# Altium PCB gecko3.PcbDoc (part 3 of 8)
Units mm, origin at the board's own origin, x right, y up, seen from the top; angles counter-clockwise.
Board outline 85.5 x 54.02 mm, 10 copper layers (Top Layer, MidLayer1, 1.2 & 2.5V Plane, GND Plane1, DDR layer 1, 3.3V Plane, DDR layer 2, GND Plane2, MidLayer2, Bottom Layer), stack 1.39 mm thick; 295 components, 567 nets, 2310 pads, 1568 vias.
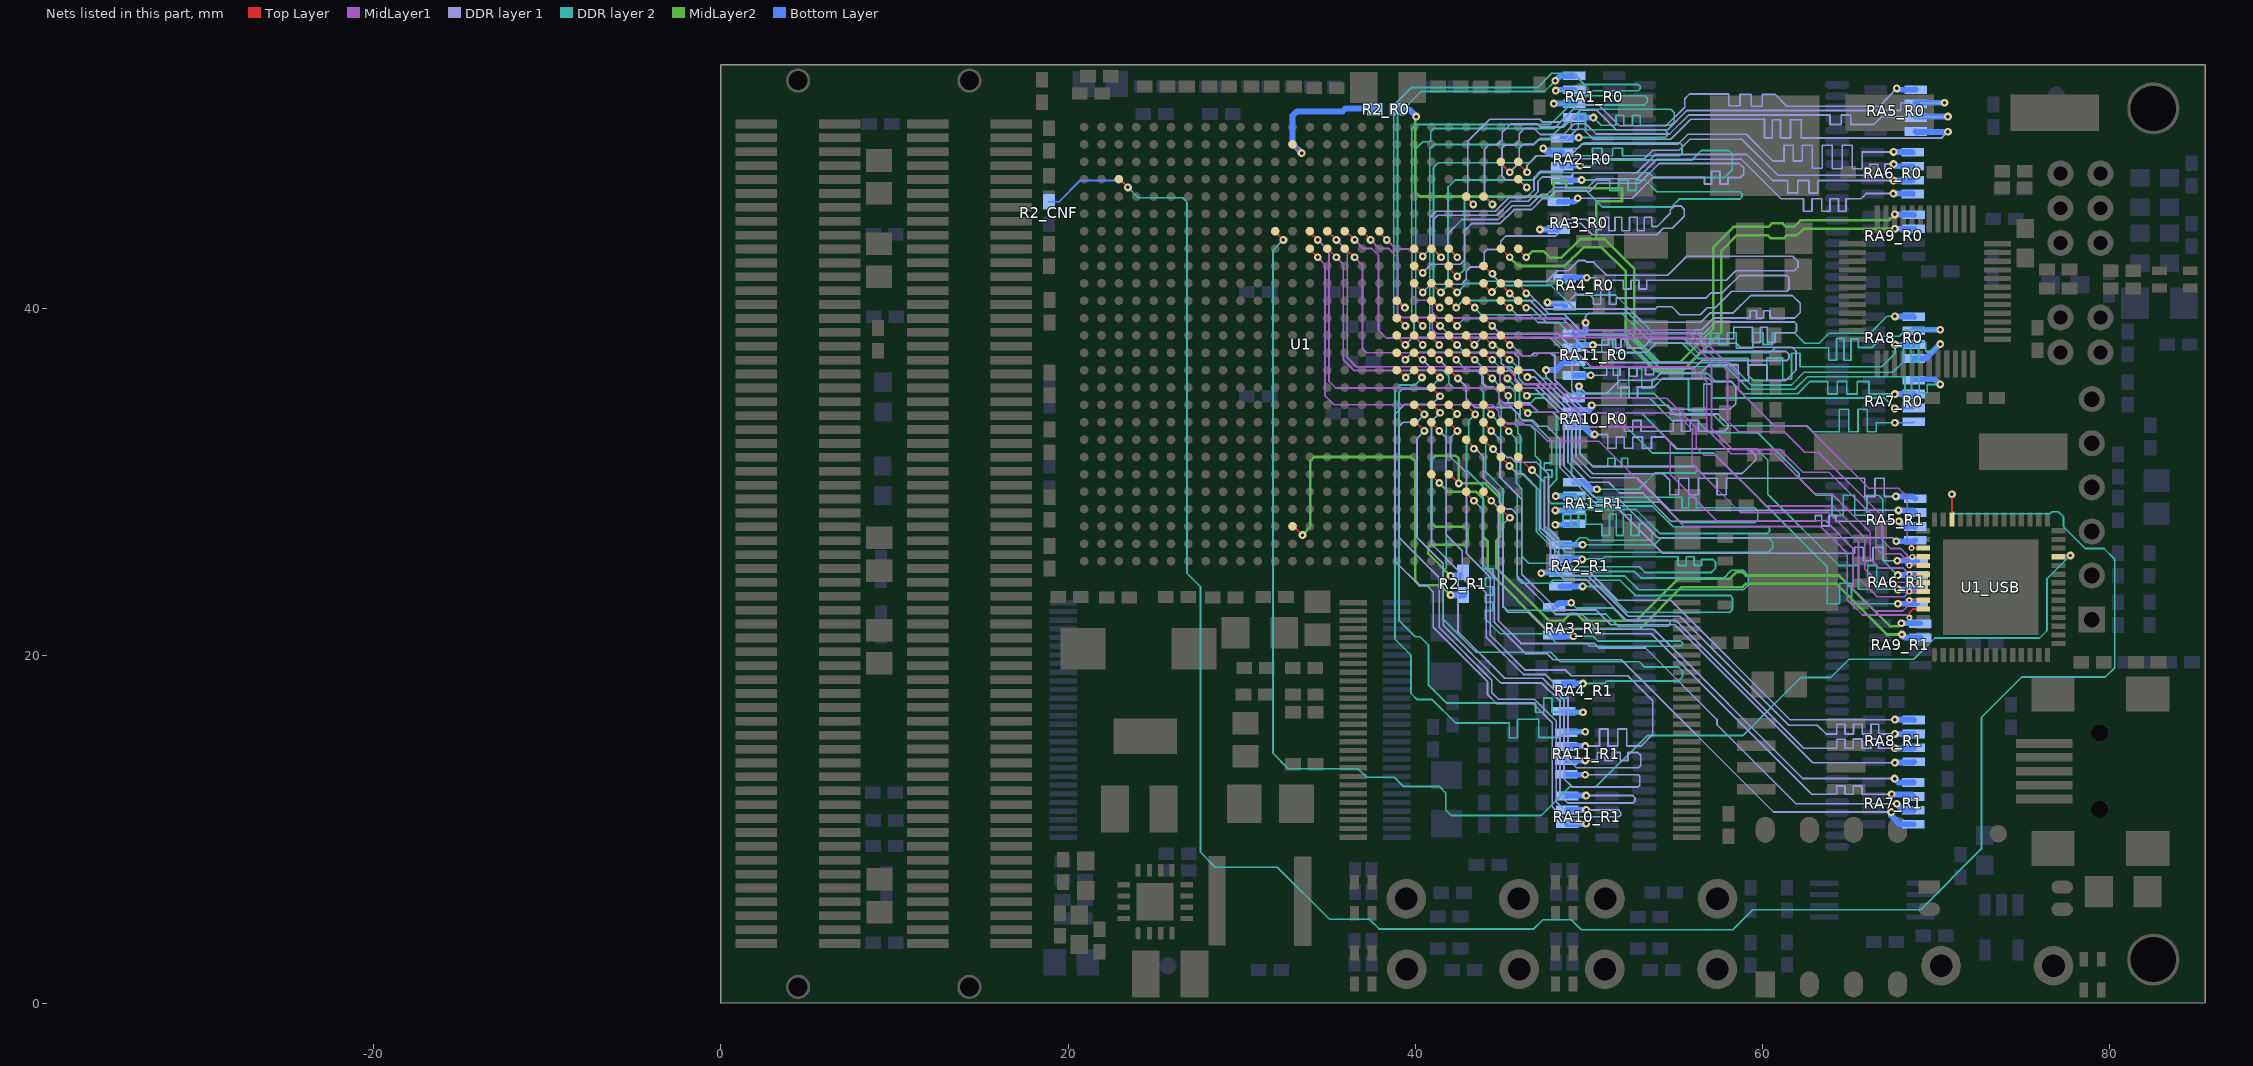
[diagram p11: the nets of this part, all layers, seen from the top]

## Via types
v1: diameter 0.45, hole 0.2, Top Layer to Bottom Layer, tented both sides, 1470 vias
v2: diameter 0.45, hole 0.2, Top Layer to Bottom Layer, tented bottom, 62 vias
v3: diameter 0.35, hole 0.15, Top Layer to MidLayer1, tented both sides, 26 vias
v4: diameter 0.45, hole 0.2, MidLayer2 to Bottom Layer, tented both sides, 10 vias

## Nets (pads, with @x,y where several pads share a name; then routed paths per layer and width w, separated by ;. In a path a pad name is that pad's centre, name@x,y a point inside that pad or via, vN(x,y) a via of type N, cw(c..) or ccw(c..) an arc to the next point about the centre after c; other vN are vias at no path point) (continued)
D7: U1.Y15 U1_USB.25 | length 87.1
  Top Layer w0.1: U1.Y15@31.927,44.449 31.927,44.423 v1(32.4,43.95) ; U1_USB.25@77.05,25.7 77.65,25.7 v1(77.725,25.775)
  DDR layer 2 w0.1: v1(32.4,43.95) 31.8,43.35 31.8,14.382 32.682,13.5 36.7,13.5 37.2,13 38.775,13 39.3,12.475 41.375,12.475 41.757,12.093 41.757,11.118 42.075,10.8 47.25,10.8 48.9,12.45 50.4,12.45 53.353,15.403 58.853,15.403 62.2,18.75 63.925,18.75 64.975,19.8 68.7,19.8 69.925,21.025 75.945,21.025 76.375,21.455 76.375,24.425 v1(77.725,25.775)
D8: U1.Y9 U1_USB.45 | length 42.9
  Top Layer w0.1: U1.Y9@37.927,44.449 37.927,44.373 v1(38.35,43.95) ; v3(68.575,26.2) U1_USB.45@69.25,26.2 U1_USB.45@69.15,26.3
  MidLayer1 w0.1: v1(38.35,43.95) 38.875,43.425 39.6,43.425 39.8,43.225 39.8,40.775 40.1,40.475 40.75,40.475 40.975,40.25 40.975,39.775 41.3,39.45 48.45,39.45 49.125,38.775 56,38.775 58.625,36.15 58.625,35.3 60.7,33.225 62.55,33.225 66.125,29.65 67.825,29.65 68.325,29.15 68.325,26.65 68.575,26.4 v3(68.575,26.2)
D9: U1.Y10 U1_USB.46 | length 44.7
  Top Layer w0.1: U1.Y10@36.927,44.449 v1(37.425,43.95) ; v3(68.625,25.7) U1_USB.46@69.25,25.7
  MidLayer1 w0.1: v1(37.425,43.95) 37.925,43.45 38.475,43.45 38.975,42.95 38.975,39.75 39.25,39.475 40.725,39.475 40.975,39.225 40.975,38.8 41.225,38.55 55.825,38.55 57.975,36.4 57.975,33.55 58.623,32.902 61.248,32.902 62.425,31.725 63.2,31.725 66.872,28.053 66.872,26.678 67.375,26.175 67.95,26.175 68.425,25.7 v3(68.625,25.7)
D10: U1.Y11 U1_USB.47 | length 47.2
  Top Layer w0.1: U1.Y11@35.927,44.449 36.001,44.449 v1(36.5,43.95) ; v3(68.45,25.2) U1_USB.47@69.25,25.2
  MidLayer1 w0.1: v1(36.5,43.95) 37,43.45 37.5,43.45 37.875,43.075 37.875,38.75 38.325,38.3 46.6,38.3 46.625,38.325 55.65,38.325 57.05,36.925 57.05,33.1 58.275,31.875 61.025,31.875 62.325,30.575 63.825,30.575 66.518,27.882 66.518,26.207 66.85,25.875 67.925,25.875 68.45,25.35 v3(68.45,25.2)
D11: U1.W11 U1_USB.48 | length 46.5
  Top Layer w0.1: U1.W11@35.927,43.449 v1(36.5,42.95) ; v3(68.45,24.7) U1_USB.48@69.25,24.7
  MidLayer1 w0.1: v1(36.5,42.95) 36.95,42.5 36.95,37.7 37.2,37.45 45.95,37.45 46.125,37.275 46.962,37.275 47.138,37.45 49.3,37.45 50.125,36.625 55.925,36.625 56.775,35.775 56.775,33.05 58.197,31.628 60.697,31.628 63,29.325 63.975,29.325 66.2,27.1 66.2,25.575 66.725,25.05 68.1,25.05 v3(68.45,24.7)
D12: U1.Y12 U1_USB.49 | length 48.2
  Top Layer w0.1: U1.Y12@34.927,44.449 34.951,44.449 v1(35.45,43.95) ; v3(68.45,24.2) U1_USB.49@69.25,24.2
  MidLayer1 w0.1: v1(35.45,43.95) 36.075,43.325 36.075,37.175 36.6,36.65 45.2,36.65 45.725,36.125 45.725,35.875 45.95,35.65 48.23,35.65 49.052,34.828 54.472,34.828 56.175,33.125 56.175,32 56.625,31.55 57.275,31.55 60.2,28.625 64.05,28.625 65.875,26.8 65.875,25 66.647,24.228 68.422,24.228 v3(68.45,24.2)
D13: U1.W12 U1_USB.50 | length 48.6
  Top Layer w0.1: U1.W12@34.927,43.449 34.951,43.449 v1(35.45,42.95) ; v3(68.45,23.7) U1_USB.50@69.25,23.7
  MidLayer1 w0.1: v1(35.45,42.95) 35.85,42.55 35.85,37.05 36.475,36.425 44.6,36.425 44.875,36.15 44.875,35.7 45.175,35.4 48.155,35.4 49.555,34 54.982,34 55.95,33.032 55.95,31.025 58.725,28.25 63.8,28.25 65.525,26.525 65.525,24.475 66.6,23.4 68.15,23.4 v3(68.45,23.7)
D14: U1.Y13 U1_USB.51 | length 51.9
  Top Layer w0.1: U1.Y13@33.927,44.449 33.927,44.398 v1(34.375,43.95) ; v3(68.45,23.2) U1_USB.51@69.25,23.2
  MidLayer1 w0.1: v1(34.375,43.95) 35.025,43.3 35.025,35.8 35.4,35.425 44.575,35.425 44.825,35.175 44.825,34.8 45.2,34.425 46.675,34.425 47.075,34.025 49.2,34.025 50.05,33.175 53.8,33.175 54.675,32.3 54.675,30.45 57.35,27.775 63.625,27.775 65.2,26.2 65.2,23.875 66.5,22.575 68.075,22.575 68.45,22.95 v3(68.45,23.2)
D15: U1.W13 U1_USB.52 | length 50.7
  Top Layer w0.1: U1.W13@33.927,43.449 33.927,43.398 v1(34.375,42.95) ; v3(68.45,22.2) 68.45,22.475 68.675,22.7 U1_USB.52@69.25,22.7
  MidLayer1 w0.1: v1(34.375,42.95) 34.8,42.525 34.8,34.975 35.325,34.45 44.425,34.45 44.8,34.075 44.8,33.825 45.25,33.375 46.25,33.375 46.35,33.275 46.7,33.275 47.625,32.35 50.575,32.35 55.475,27.45 63.325,27.45 64.875,25.9 64.875,23.225 65.75,22.35 68.3,22.35 v3(68.45,22.2)
DONE: R2_CNF.2 U1.AC24 U1_USB.40 | length 132.7
  Top Layer w0.1: U1.AC24@22.927,47.449 22.976,47.449 v1(23.45,46.975) ; U1_USB.40@70.9,27.85 v1(70.9,29.3)
  DDR layer 2 w0.1: v1(23.45,46.975) 24.025,46.375 26.6,46.375 26.85,46.125 26.85,24.75 27.625,23.975 27.625,8.68 28.48,7.825 32.05,7.825 35.055,4.82 37.355,4.82 37.905,4.27 46.82,4.27 47.35,4.8 48.982,4.8 49.557,4.225 58.275,4.225 59.425,5.375 69.1,5.375 72.6,8.875 72.6,16.448 74.927,18.775 79.728,18.775 80.272,19.318 80.272,25.565 79.662,26.175 78.575,26.175 77.325,27.425 77.325,28 77.025,28.3 76.675,28.3 76.55,28.175 71.075,28.175 70.9,28.35 v1(70.9,29.3)
  Bottom Layer w0.1: R2_CNF.2@18.9,46.15 19.475,46.15 20.7,47.375 23.025,47.375 v1(23.45,46.975)
DRAM_A0_0: RA2_R0.4 U1.P6 | length 35.3
  Top Layer w0.1: U1.P6@40.927,38.449 40.927,38.348 v1(41.375,37.9)
  DDR layer 2 w0.1: 41.085,49.45 40.825,49.19 40.825,38.45 v1(41.375,37.9) ; 47.6,49.796 47.746,49.796 48.7,50.75 48.975,50.75 48.975,50.3 49.375,50.3 49.375,51.241 49.8,51.241 49.8,50.296 ; v1(49.411,49.846) 54.386,49.846 54.511,49.971 54.511,50.146 54.361,50.296 50.661,50.296
  DDR layer 2 w0.101: 41.085,49.45 46.84,49.45 47.186,49.796 47.6,49.796 ; 49.8,50.296 50.661,50.296
  Bottom Layer w0.34: RA2_R0.4@48.461,49.796 v1(49.411,49.846)
DRAM_A0_1: RA1_R0.1 U1.R7 | length 36.1
  Top Layer w0.1: U1.R7@39.927,39.449 39.976,39.449 v1(40.425,39) v1@40.425,38.975
  DDR layer 2 w0.1: v1@40.425,38.975 40.412,38.988 40.025,39.375 40.025,49.185 40.436,49.596 40.786,49.596 40.886,49.696 40.886,50.196 41.061,50.371 47.996,50.371 49.1,51.475 54.7,51.475 54.911,51.264 54.911,50.771 54.686,50.546 52.95,50.546 52.95,51.125 52.5,51.125 52.5,50.546 52,50.546 52,51.125 51.55,51.125 51.55,50.546 50.705,50.546 v1(50.255,50.996)
  Bottom Layer w0.34: RA1_R0.1@49.161,50.996 v1(50.255,50.996)
DRAM_A0_2: RA1_R0.2 U1.P7 | length 34.7
  Top Layer w0.1: U1.P7@39.927,38.449 39.927,38.398 v1(40.425,37.9)
  DDR layer 2 w0.1: v1(40.425,37.9) 39.927,38.398 39.927,39.148 39.8,39.275 39.8,50.335 40.061,50.596 47.771,50.596 48.771,51.596
  DDR layer 2 w0.101: v1(47.975,51.8) 48.536,51.796 48.99,52.25 53.225,52.25 53.361,52.114 53.361,51.871 53.215,51.725 48.9,51.725 48.771,51.596
  Bottom Layer w0.34: v1(47.975,51.8) RA1_R0.2@49.161,51.796
DRAM_A0_3: RA1_R0.3 U1.R8 | length 35.1
  Top Layer w0.1: U1.R8@38.927,39.449 38.976,39.449 v1(39.425,39)
  DDR layer 2 w0.1: v1@39.438,38.987 v1(39.425,39) 38.75,39.675 38.75,51.714 39.759,52.724
  DDR layer 2 w0.101: 39.759,52.724 47.039,52.724 47.861,53.546 49.111,53.546 49.761,52.896 52.854,52.896 52.95,52.8 52.95,52.65 52.85,52.55 ; v1(48.086,52.546) 52.85,52.546
  Bottom Layer w0.34: v1@48.086,52.596 RA1_R0.3@49.161,52.596
DRAM_A0_4: RA1_R0.4 U1.T8 | length 23.1
  Top Layer w0.1: U1.T8@38.927,40.449 39.365,40.015 39.402,39.978 v1@39.415,39.965
  DDR layer 2 w0.1: v1(39.4,40.05) 38.977,40.473 38.977,51.127 40.346,52.496 47.436,52.496 v1(48.061,53.121)
  Bottom Layer w0.34: v1(48.061,53.121) 48.336,53.396 RA1_R0.4@49.161,53.396
DRAM_A0_5: RA5_R0.5 U1.AB4 | length 36.1
  Top Layer w0.1: U1.AB4@42.938,46.394 v1(43.336,45.996)
  DDR layer 1 w0.101: v1(43.336,45.996) 43.011,46.321 43.011,49.621 44.286,50.896 47.161,50.896 47.311,50.746 48.361,50.746 49.336,51.721 50.561,51.721 51.76,50.522 54.437,50.522 55.511,51.596 55.511,52.071 55.79,52.35 58.05,52.35 58.05,51.675 58.7,51.675 58.7,52.325 59.35,52.325 59.35,51.65 59.975,51.65 59.975,52.325 60.722,52.325 61.4,51.647 66.748,51.647 v1(67.725,52.675)
  Bottom Layer w0.34: v1(67.725,52.675) 67.804,52.596 RA5_R0.5@68.811,52.596 RA5_R0.5@68.782,52.625
DRAM_A0_6: RA5_R0.6 U1.AB3 | length 35.8
  Top Layer w0.1: U1.AB3@43.927,46.449 U1.AB3@44.026,46.449 ; U1.AB3@44.037,46.395 v1(44.436,45.996)
  DDR layer 1 w0.101: v1(44.436,45.996) 43.986,46.446 43.986,49.171 44.24,49.425 44.715,49.425 45.011,49.721 45.011,50.146 45.49,50.625 47.032,50.625 47.211,50.446 48.511,50.446 49.486,51.421 50.436,51.421 51.561,50.296 54.536,50.296 55.64,51.4 67.95,51.4 67.95,51.85 68.475,51.85 68.475,51.4 69.1,51.4 69.1,51.85 v1(70.475,51.85)
  Bottom Layer w0.34: RA5_R0.6@68.8,51.85 68.811,51.85 v1(70.475,51.85)
DRAM_A0_7: RA5_R0.7 U1.AC1 | length 35.2
  Top Layer w0.1: U1.AC1@45.927,47.449 U1.AC1@45.977,47.448 ; U1.AC1@45.988,47.394 v1(46.411,46.971)
  DDR layer 1 w0.1: v1(46.411,46.971) 45.986,47.396 45.236,47.396 44.986,47.646 44.986,49.236 45.171,49.421 45.761,49.421 45.986,49.646 45.986,50.071 46.282,50.367 46.84,50.367 47.186,50.021 48.536,50.021 49.161,50.646 49.811,50.646 50.411,50.046 54.636,50.046 55.736,51.146 63.875,51.146 63.875,50.6 64.525,50.6 64.525,51.15 65.075,51.15 65.075,50.6 66.4,50.6 66.85,51.05 v1(70.675,51.05)
  Bottom Layer w0.34: RA5_R0.7@68.8,51.05 68.811,51.05 v1(70.675,51.05)
DRAM_A0_8: RA5_R0.8 U1.AD2 | length 35.5
  Top Layer w0.101: U1.AD2@44.927,48.398 U1.AD2@44.927,48.449 ; U1.AD2@44.938,48.344 v1(45.436,47.846)
  DDR layer 1 w0.101: v1(45.436,47.846) 45.986,48.396 45.986,49.211 46.221,49.446 46.786,49.446 47.061,49.721 48.686,49.721 49.286,50.321 49.686,50.321 50.261,49.746 54.711,49.746 55.865,50.9 60.111,50.9 60.111,49.825 60.561,49.825 60.561,50.871 61.036,50.871 61.036,49.825 61.6,49.825 61.6,50.875 62.225,50.875 62.225,49.825 70.325,49.825 v1(70.675,50.175)
  Bottom Layer w0.34: RA5_R0.8@68.811,50.196 RA5_R0.8@68.886,50.121 ; RA5_R0.8@68.875,50.175 v1(70.675,50.175)
DRAM_A0_9: RA6_R0.5 U1.AD1 | length 35.1
  Top Layer w0.101: U1.AD1@45.927,48.398 U1.AD1@45.927,48.449 ; U1.AD1@45.938,48.344 v1(46.436,47.846)
  DDR layer 1 w0.101: v1(46.436,47.846) 46.436,48.246 46.99,48.8 48.915,48.8 49.586,49.471 55.136,49.471 55.699,50.034 59.047,50.034 60.586,48.496 61.236,48.496 61.236,49.4 61.761,49.4 61.761,48.496 62.286,48.496 62.286,49.4 62.861,49.4 62.861,48.071 63.436,48.071 63.436,49.4 64.011,49.4 64.011,48.046 64.586,48.046 64.586,49.4 65.161,49.4 65.161,48.05 65.736,48.05 65.736,49.017 v1(67.541,49.017)
  Bottom Layer w0.34: v1(67.541,49.017) 68.609,49.017 RA6_R0.5@68.634,48.991
DRAM_A0_10: RA2_R0.3 U1.T6 | length 35.1
  Top Layer w0.1: U1.T6@40.927,40.449 41.001,40.449 v1(41.4,40.05)
  DDR layer 2 w0.1: 41.075,40.35 41.086,40.34 ; 41.311,48.396 41.05,48.135 41.05,40.376 41.086,40.34 ; v1(41.4,40.05) 41.086,40.34 ; v1(47.367,49.222) 48.96,49.222 ; 50.2,48.796 50.2,49.225 50.75,49.225 50.75,48.796 ; 51.375,48.796 51.375,49.225 51.925,49.225 51.925,48.796
  DDR layer 2 w0.101: 41.311,48.396 46.571,48.396 46.971,48.796 50.2,48.796 ; 48.96,49.222 49.387,49.222 49.711,49.546 55.211,49.546 55.361,49.396 55.361,48.946 55.211,48.796 51.925,48.796 ; 50.75,48.796 51.375,48.796
  Bottom Layer w0.34: v1(47.367,49.222) 47.593,48.996 RA2_R0.3@48.461,48.996
DRAM_A0_11: RA6_R0.6 U1.W7 | length 35.9
  Top Layer w0.1: U1.W7@39.927,43.449 39.976,43.449 v1(40.425,43)
  DDR layer 1 w0.1: v1(40.425,43) 40.825,43.4 40.825,45.225 41.196,45.596 44.611,45.596 45.411,46.396 46.411,46.396 46.836,46.821 46.836,47.546 47.186,47.896 48.461,47.896 49.186,48.621 53.186,48.621 53.686,49.121 55.186,49.121 55.815,49.75 58.807,49.75 60.882,47.675 66.175,47.675 66.175,48.3 66.625,48.3 66.625,47.7 67.05,47.7 67.05,48.316 v1(67.541,48.316)
  Bottom Layer w0.34: v1(67.541,48.316) 67.666,48.191 RA6_R0.6@68.634,48.191
DRAM_A0_12: RA6_R0.7 U1.W6 | length 36.1
  Top Layer w0.1: U1.W6@40.927,43.449 U1.W6@41.026,43.449 ; U1.W6@41.037,43.395 v1(41.486,42.946)
  DDR layer 1 w0.1: v1(41.486,42.946) 41.05,43.382 41.05,45.125 41.296,45.371 44.711,45.371 45.511,46.171 46.511,46.171 47.061,46.721 47.061,47.321 47.311,47.571 48.911,47.571 49.161,47.821 52.761,47.821 53.811,48.871 59.086,48.871 60.586,47.371 61.45,47.371 61.45,46.65 62.025,46.65 62.025,47.371 62.675,47.371 62.675,46.65 63.175,46.65 63.175,47.371 67.536,47.371 v1(67.541,47.366)
  Bottom Layer w0.34: v1(67.541,47.366) 68.609,47.366 RA6_R0.7@68.634,47.391
DRAM_A0_13: RA4_R0.3 U1.V3 | length 36.1
  Top Layer w0.1: U1.V3@43.927,42.449 43.927,42.498 U1.V3@43.951,42.473 ; U1.V3@43.962,42.419 44.411,41.971 v1@44.436,41.946
  DDR layer 1 w0.101: v1@44.436,41.946 44.836,41.546 47.546,41.546 48.174,42.174 48.814,42.174 49.411,42.771 49.761,42.771 49.861,42.671 50.261,42.671 51.019,41.912 54.534,41.912 55.636,43.015 61.742,43.015 62.036,42.721 62.036,42.396 61.815,42.175 58.45,42.175 57.896,41.621 53.325,41.621 53.325,41.125 52.875,41.125 52.875,41.621 52.425,41.621 52.425,41.125 51.975,41.125 51.975,41.621 50.561,41.621 50.407,41.775 v1(49.875,41.775)
  Bottom Layer w0.34: RA4_R0.3@48.611,41.746 48.64,41.775 v1(49.875,41.775)
  other v1: 44.436,41.996
DRAM_A1_0: RA2_R1.4 U1.L2 | length 36.2
  Top Layer w0.101: U1.L2@44.927,35.449 44.927,35.423 v1(45.35,34.975)
  DDR layer 2 w0.101: v1(45.35,34.975) 45.35,34.48 45.777,34.053 45.777,33.603 46.08,33.3 46.58,33.3 46.902,32.978 46.902,31.523 47.202,31.223 47.202,27.403 48.65,25.955 60.33,25.955 60.586,26.211 60.586,26.539 60.347,26.778 54.143,26.778 53.761,26.396 v1(49.63,26.396)
  Bottom Layer w0.34: RA2_R1.4@48.361,26.396 v1(49.63,26.396)
DRAM_A1_1: RA1_R1.1 U1.M3 | length 35.6
  Top Layer w0.1: U1.M3@43.927,36.449 43.951,36.449 v1(44.425,35.975)
  DDR layer 2 w0.1: 47.43,30.275 47.875,30.275 47.875,30.7 47.43,30.7 47.43,31.1 47.85,31.1 47.85,31.65 ; 52.425,26.925 52.875,26.925 52.875,27.6 53.175,27.6 53.611,27.164 53.611,26.925
  DDR layer 2 w0.101: v1(44.425,35.975) 44.925,35.475 45.45,35.475 45.752,35.173 45.752,34.473 46.025,34.2 46.025,33.725 46.2,33.55 46.653,33.55 47.85,32.353 47.85,31.65 ; 47.43,30.275 47.43,27.495 48.554,26.371 49.036,26.371 49.464,26.799 49.858,26.799 50.011,26.646 53.611,26.646 53.611,26.925 ; v1(48.067,27.545) 48.5,27.546 48.5,28.121 48.95,28.121 48.95,27.396 49.4,27.396 49.4,28.171 49.811,28.171 49.811,27.571 50.75,27.571 50.75,26.925 51.175,26.925 51.175,28.15 51.575,28.15 51.575,26.925 51.975,26.925 51.975,28.125 52.425,28.125 52.425,26.925
  Bottom Layer w0.34: v1(48.067,27.545) 49.11,27.545 RA1_R1.1@49.161,27.596
DRAM_A1_2: RA1_R1.2 U1.K1 | length 35.2
  Top Layer w0.1: U1.K1@45.927,34.449 46.001,34.449 v1(46.475,33.975)
  DDR layer 2 w0.101: v1(46.475,33.975) 46.528,34.028 47.922,34.028 48.125,33.825 48.125,30.135 47.675,29.685 47.675,28.932 47.836,28.771 49.836,28.771 49.982,28.625 53.65,28.625 54.847,27.428 60.272,27.428 60.4,27.3 60.4,27.175 60.271,27.046 54.086,27.046 52.711,28.421 48.711,28.421 48.661,28.371 v1(48.067,28.371)
  Bottom Layer w0.34: v1(48.067,28.371) 49.136,28.371 RA1_R1.2@49.161,28.396
DRAM_A1_3: RA1_R1.3 U1.M2 | length 36
  Top Layer w0.1: U1.M2@44.927,36.449 44.927,36.373 45.3,36 v1(45.3,35.975)
  DDR layer 2 w0.1: 54.725,29.125 55.35,29.125 55.35,28.525 55.75,28.525 55.75,29.125 56.175,29.125 56.175,28.521 56.5,28.521
  DDR layer 2 w0.101: v1(45.3,35.975) 46,35.275 46,34.75 46.247,34.503 46.578,34.503 46.925,34.85 47.45,34.85 49,33.3 49,30.4 50.275,29.125 54.725,29.125 ; v1(48.086,29.196) 49.734,29.196 50.077,28.853 54.122,28.853 55.319,27.656 59.556,27.656 59.725,27.825 59.725,28.35 59.554,28.521 56.5,28.521
  Bottom Layer w0.34: v1(48.086,29.196) RA1_R1.3@49.161,29.196
DRAM_A1_4: RA1_R1.4 U1.L1 | length 22.9
  Top Layer w0.1: U1.L1@45.927,35.448 v1(46.425,34.975)
  DDR layer 2 w0.1: v1@50.455,29.595 52.87,29.595 53.8,30.525 56.1,30.525 56.2,30.625 ; 51.075,30.906 51.075,31.375 51.5,31.375 51.5,30.9 51.875,30.9 51.875,31.375 52.225,31.375 52.225,30.906
  DDR layer 2 w0.101: v1(46.425,34.975) 46.578,35.078 47.542,35.078 49.445,33.175 49.445,31.655 50.194,30.906 51.075,30.906 ; 52.225,30.906 56.119,30.906 56.2,30.825 56.2,30.625
  Bottom Layer w0.34: RA1_R1.4@49.161,29.996 49.736,29.996 50.137,29.595 v1(50.455,29.595)
DRAM_A1_5: RA5_R1.5 U1.M1 | length 35.6
  Top Layer w0.1: U1.M1@45.927,36.423 U1.M1@45.977,36.423 ; U1.M1@45.927,36.449 46.001,36.449 46.4,36.05 v1(46.45,36.05)
  DDR layer 1 w0.101: v1(46.45,36.05) 46.875,36.05 49.252,33.673 49.252,31.448 50.222,30.478 54.272,30.478 54.647,30.103 54.647,29.278 54.65,29.275 55.175,29.275 55.175,30.225 55.75,30.225 55.75,29.275 56.3,29.275 56.3,30.228 57.375,30.228 57.375,29.275 57.9,29.275 57.9,30.228 65.875,30.228 65.875,29.175 66.475,29.175 66.475,30.225 67,30.225 67,29.175 v1(67.675,29.175)
  Bottom Layer w0.34: v1(67.675,29.175) 68.657,29.175 RA5_R1.5@68.786,29.046
DRAM_A1_6: RA5_R1.6 U1.N8 | length 35.7
  Top Layer w0.1: U1.N8@38.927,37.449 39.026,37.449 v1(39.425,37.05)
  DDR layer 1 w0.101: v1(39.425,37.05) 39.85,37.475 44.575,37.475 44.95,37.1 44.95,36.85 45.172,36.628 45.347,36.628 45.747,36.228 45.747,35.953 46.067,35.633 46.967,35.633 49.025,33.575 49.025,31.307 50.086,30.246 52.779,30.246 54.65,28.375 v1(67.825,28.375)
  Bottom Layer w0.34: v1(67.825,28.375) 68.657,28.375 RA5_R1.6@68.786,28.246
DRAM_A1_7: RA5_R1.7 U1.N6 | length 35.7
  Top Layer w0.1: U1.N6@40.927,37.449 U1.N6@40.949,37.449
  Top Layer w0.101: U1.N6@40.927,37.449 41.325,37.05 v1(41.375,37.05)
  DDR layer 1 w0.101: v1(41.375,37.05) 41.781,36.644 44.711,36.644 44.875,36.48 44.875,35.75 45.222,35.403 46.877,35.403 48.789,33.491 48.789,31.136 49.929,29.996 51.129,29.996 51.754,29.371 53.104,29.371 54.725,27.75 63.025,27.75 63.025,28.075 63.4,28.075 63.4,27.475 63.825,27.475 63.825,28.075 64.225,28.075 64.225,27.75 v1(67.85,27.75)
  Bottom Layer w0.34: v1(67.85,27.75) 68.15,27.45 RA5_R1.7@68.775,27.45 ; RA5_R1.7@68.761,27.421 RA5_R1.7@68.786,27.446
DRAM_A1_8: RA5_R1.8 U1.N7 | length 35.4
  Top Layer w0.1: U1.N7@39.927,37.373 U1.N7@39.927,37.449
  Top Layer w0.101: U1.N7@39.927,37.449 40.326,37.05 v1(40.425,37.05)
  DDR layer 1 w0.101: v1(40.425,37.05) 41.025,36.45 41.575,36.45 41.625,36.4 43.575,36.4 43.9,36.075 43.9,35.675 44.1,35.475 44.5,35.475 44.825,35.15 44.825,34.775 45.05,34.55 46.575,34.55 47.097,34.028 47.917,34.028 48.561,33.383 48.561,30.914 50.475,29 51.75,29 53.95,26.8 67.488,26.8 v1(67.692,26.595)
  Bottom Layer w0.34: v1(67.692,26.595) 68.735,26.595 RA5_R1.8@68.786,26.646
DRAM_A1_9: RA6_R1.5 U1.M5 | length 35.4
  Top Layer w0.1: U1.M5@41.927,36.449 41.976,36.449 v1(42.45,35.975)
  DDR layer 1 w0.101: v1(42.45,35.975) 42.925,35.5 42.925,34.8 43.422,34.303 45.522,34.303 45.95,33.875 45.95,33.8 46.2,33.55 46.78,33.55 47.109,33.221 47.579,33.221 48.327,32.473 48.327,30.828 50.459,28.696 51.454,28.696 54.25,25.9 65.3,25.9 65.3,26.25 65.8,26.25 65.8,25.475 66.35,25.475 66.35,26.25 66.95,26.25 66.95,25.475 v1(67.75,25.475) ; v1@67.769,25.494 v1@67.792,25.471
  Bottom Layer w0.34: v1@67.792,25.471 68.861,25.471 RA6_R1.5@68.886,25.446
DRAM_A1_10: RA2_R1.3 U1.N5 | length 35.9
  Top Layer w0.1: U1.N5@41.927,37.449 41.951,37.449 v1(42.35,37.05)
  DDR layer 2 w0.1: 55.125,25.7 55.125,25.2 55.6,25.2 55.6,25.7 ; 56.05,25.7 56.05,25.2 56.475,25.2 56.475,25.55
  DDR layer 2 w0.101: v1(42.35,37.05) 42.975,36.425 43.555,36.425 43.827,36.153 43.827,35.698 44.147,35.378 44.602,35.378 44.837,35.143 44.837,34.513 44.95,34.4 44.95,33.725 45.3,33.375 45.675,33.375 45.9,33.15 45.9,32.825 46.052,32.673 46.052,30.553 46.975,29.63 46.975,27.15 49.004,25.121 52.904,25.121 53.225,24.8 57.05,24.8 57.286,25.036 57.286,25.396 57.132,25.55 56.475,25.55 ; v1@49.611,25.571 50.796,25.571 50.925,25.7 55.125,25.7 ; 55.6,25.7 56.05,25.7
  Bottom Layer w0.34: RA2_R1.3@48.361,25.596 49.528,25.596 v1(49.611,25.546)
DRAM_A1_11: RA6_R1.6 U1.N2 | length 36.1
  Top Layer w0.1: U1.N2@44.927,37.449 44.976,37.449 45.4,37.025 v1@45.425,37
  DDR layer 2 w0.1: 64,29.25 64,28.075 64.65,28.075 64.65,29.25 65.3,29.25 65.3,28.1 66.011,28.1 66.011,29.239 66,29.25 66.675,29.25 66.925,29 66.925,27.186
  DDR layer 2 w0.101: v1@45.425,37 45.45,37.025 45.5,37.025 46.072,36.453 46.822,36.453 47.3,35.975 47.63,35.975 48.755,34.85 53.475,34.85 54.775,33.55 56.225,33.55 56.925,32.85 59.725,32.85 62.1,30.475 62.1,30.225 63.075,29.25 64,29.25 ; 66.925,27.186 66.925,25.513 v1(67.792,24.646)
  Bottom Layer w0.34: v1(67.792,24.646) RA6_R1.6@68.886,24.646
  other v1: 45.425,37.05
DRAM_A1_12: RA6_R1.7 U1.N3 | length 35.5
  Top Layer w0.1: U1.N3@43.927,37.449 44.326,37.05 v1(44.425,37.05)
  DDR layer 2 w0.1: 64.4,25.2 65.525,25.2 65.525,23.825 66.05,23.825 66.05,25.2 66.575,25.2 66.575,23.825 67.788,23.825 v1(67.792,23.821)
  DDR layer 2 w0.101: v1(44.425,37.05) 44.847,36.628 45.572,36.628 45.952,36.248 45.952,35.973 46.297,35.628 47.647,35.628 49.275,34 53,34 55.05,31.95 ; 55.061,31.925 59.65,31.925 60.3,31.275 60.3,29.3 64.4,25.2
  Bottom Layer w0.34: v1(67.792,23.821) 68.861,23.821 RA6_R1.7@68.886,23.846
DRAM_A1_13: RA4_R1.3 U1.K5 | length 35.2
  Top Layer w0.1: U1.K5@41.927,34.449 41.927,34.398 v1(42.4,33.925)
  DDR layer 2 w0.101: v1(42.4,33.925) 41.777,33.302 41.777,25.052 41.6,24.875 41.6,22.105 43.228,20.478 43.502,20.203 47.797,20.203 48.351,19.649 52.908,19.649 53.211,19.346 55.154,19.346 55.389,19.111 55.389,18.789 55.146,18.546 51.021,18.546 50.871,18.396 v1(49.655,18.396)
  Bottom Layer w0.34: RA4_R1.3@48.561,18.396 v1(49.655,18.396)
DRAM_BA0_0: RA2_R0.1 U1.V5 | length 35.4
  Top Layer w0.1: U1.V5@41.927,42.373 U1.V5@41.927,42.449 ; U1.V5@41.938,42.319 v1(42.411,41.846)
  DDR layer 2 w0.1: 42.836,43.521 42.836,46.296 43.011,46.471 47.821,46.471 48.15,46.8 49.807,46.8 50.761,45.846 54.736,45.846 55.19,46.3 58.675,46.3 58.811,46.436 58.811,46.589 58.675,46.725 53.9,46.725 53.225,47.4 52.725,47.4 52.725,46.8 52.25,46.8 52.25,47.4 51.7,47.4 51.7,46.8 51.2,46.8 51.2,47.4 v1(49.575,47.4)
  DDR layer 2 w0.101: v1(42.411,41.846) 42.836,42.271 42.836,43.521
  Bottom Layer w0.34: RA2_R0.1@48.461,47.396 48.486,47.371 v1(49.575,47.4)
DRAM_BA0_1: RA2_R0.2 U1.U6 | length 35.2
  Top Layer w0.1: U1.U6@40.927,41.449 41.351,41.025 v1(41.475,40.925)
  DDR layer 2 w0.1: v1(41.475,40.925) 41.886,41.336 41.886,46.996 42.286,47.396 46.786,47.396 47.211,47.821 53.446,47.821 53.717,47.55 57.814,47.55 58.25,47.986 58.25,48.896 58.05,49.096 56.461,49.096 55.911,48.546 50.511,48.546 50.186,48.221 v1(49.486,48.221)
  Bottom Layer w0.34: RA2_R0.2@48.461,48.196 48.486,48.221 v1(49.486,48.221)
DRAM_BA1_0: RA2_R1.1 U1.K3 | length 35.1
  Top Layer w0.101: U1.K3@43.925,34.449 43.926,34.448 44.35,34.024 v1(44.35,33.9)
  DDR layer 2 w0.101: v1(44.35,33.9) 44.925,33.325 44.925,30.225 45.875,29.275 45.875,24.432 46.136,24.171 47.736,24.171 47.911,24.346 51.786,24.346 52.657,23.475 58.125,23.475 58.261,23.339 58.261,22.661 58.1,22.5 52.207,22.5 50.711,23.996 v1(49.63,23.996)
  Bottom Layer w0.34: RA2_R1.1@48.361,23.996 v1(49.63,23.996)
DRAM_BA1_1: RA2_R1.2 U1.J2 | length 36.2
  Top Layer w0.101: U1.J2@44.927,33.449 44.927,33.431 45.404,32.954 v1@45.414,32.943
  DDR layer 2 w0.101: v1(45.375,32.925) 45.825,32.475 45.825,29.925 46.125,29.625 46.125,25.725 46.522,25.328 47.779,25.328 48.261,24.846 52.636,24.846 53.007,24.475 57.75,24.475 58.2,24.925 58.875,24.925 59.175,24.625 59.175,24.075 58.9,23.8 52.857,23.8 52.061,24.596 48.004,24.596 47.85,24.75 v1(47.25,24.75)
  Bottom Layer w0.34: v1@47.257,24.768 47.286,24.796 RA2_R1.2@48.361,24.796
DRAM_C\A\S\0: RA3_R0.2 U1.U7 | length 35.8
  Top Layer w0.1: U1.U7@39.927,41.449 40.326,41.05 v1(40.425,40.925)
  DDR layer 1 w0.1: v1(40.425,40.925) 40.9,41.4 42.665,41.4 42.936,41.671 42.936,42.146 43.186,42.396 43.711,42.396 43.961,42.646 43.961,43.246 44.111,43.396 44.686,43.396 44.911,43.621 44.911,43.871 45.215,44.175 48.09,44.175 48.818,44.903 49.527,44.903 50.184,44.246 53.911,44.246 54.286,44.621 54.786,44.621 55.486,45.321 55.486,45.721 55.311,45.896 54.911,45.896 54.686,45.671 54.686,45.486 53.925,44.725 53.611,44.725 53.611,45.25 53.186,45.25 53.186,44.475 52.786,44.475 52.786,45.25 52.336,45.25 52.336,44.475 51.886,44.475 51.886,45.25 51.5,45.25 51.5,44.475 51.136,44.475 51.136,45.25 50.711,45.25 50.711,44.55 50.432,44.55 49.838,45.144 48.509,45.144 47.911,44.546 v1(47.175,44.55)
  Bottom Layer w0.34: v1(47.175,44.55) RA3_R0.2@48.261,44.546
DRAM_C\A\S\1: RA3_R1.2 U1.K4 | length 35.6
  Top Layer w0.1: U1.K4@42.927,34.449 42.927,34.423 v1(43.45,33.9)
  DDR layer 2 w0.1: 42.95,30.675 43.9,29.725 43.9,25.575 ; 43.9,25 44.475,25 44.475,24.5 44.033,24.5 ; 44.033,22.6 44.475,22.6 44.475,23.075 44.033,23.075 ; 44.033,23.5 44.475,23.5 44.475,23.975 44.033,23.975
  DDR layer 2 w0.101: 42.95,30.675 42.95,32.125 43.075,32.25 43.075,33.525 v1(43.45,33.9) ; 43.9,25 43.9,25.575 ; 44.033,22.6 44.033,22.117 44.876,21.274 47.576,21.274 48.129,20.721 49.854,20.721 50.029,20.546 55.286,20.546 55.386,20.646 55.386,20.746 55.283,20.849 50.508,20.849 50.236,21.121 v1(49.105,21.121) ; 44.033,23.075 44.033,23.5 ; 44.033,23.975 44.033,24.5
  Bottom Layer w0.34: RA3_R1.2@48.011,21.196 48.086,21.121 v1(49.105,21.121)
DRAM_C\K\0: RA9_R0.6 U1.W2 | length 36.2
  Top Layer w0.1: U1.W2@44.927,43.449 U1.W2@44.976,43.449 ; U1.W2@44.987,43.395 v1(45.436,42.946)
  MidLayer2 w0.15: v1(45.436,42.946) 45.932,42.45 48.6,42.45 49.676,43.526 50.724,43.526 52.125,42.125 52.125,38.075 53.8,36.4 55.375,36.4 57.625,38.65 57.625,43.325 58.525,44.225 60.287,44.225 60.463,44.05 61.237,44.05 61.412,44.225 61.975,44.225 62.341,44.591 67.234,44.591 v4(67.616,44.591)
  Bottom Layer w0.34: v4(67.616,44.591) RA9_R0.6@68.709,44.591
DRAM_C\K\1: RA9_R1.6 U1.F6 | length 36.5
  Top Layer w0.1: U1.F6@40.927,30.449 40.927,30.398 v1(41.375,29.95)
  MidLayer2 w0.15: v1(41.375,29.95) 41.875,29.45 43.5,29.45 43.9,29.05 43.9,26.855 44.175,26.58 44.175,24.9 47.525,21.55 52.925,21.55 55.325,23.95 58.852,23.95 59.052,24.15 64.225,24.15 67.15,21.225 v1(68.025,21.225)
  Bottom Layer w0.34: v1(68.025,21.225) 68.204,21.046 RA9_R1.6@69.086,21.046
DRAM_C\S\0: RA3_R0.4 U1.V7 | length 36.7
  Top Layer w0.1: U1.V7@39.927,42.449 40.326,42.05 v1(40.425,42.05)
  DDR layer 1 w0.1: v1(40.425,42.05) 40.921,42.546 42.586,42.546 42.85,42.81 42.85,44.485 43.264,44.899 44.888,44.899 45.686,45.696 46.686,45.696 47.313,46.324 47.664,46.324 48.086,46.746 50.036,46.746 50.498,47.209 52.898,47.209 54.043,48.353 58.654,48.353 58.911,48.096 58.911,47.721 58.74,47.55 58,47.55 58,47.175 57.55,47.175 57.55,47.9 57.05,47.9 57.05,47.175 56.65,47.175 56.65,47.55 53.69,47.55 52.49,46.35 v1(49.35,46.35)
  Bottom Layer w0.34: RA3_R0.4@48.261,46.146 49.146,46.146 v1(49.35,46.35)
DRAM_C\S\1: RA3_R1.4 U1.M8 | length 36.3
  Top Layer w0.1: U1.M8@38.927,36.449 39.026,36.449 v1(39.45,36.025)
  DDR layer 2 w0.101: v1(39.45,36.025) 39.902,36.45 41.575,36.45 41.925,36.1 41.925,35.7 42.197,35.428 43.672,35.428 43.925,35.175 43.925,32.5 44.05,32.375 44.05,30.6 45.044,29.606 45.044,22.888 45.307,22.625 47.85,22.625 48.075,22.4 50.982,22.4 51.686,21.696 54.546,21.696 54.666,21.816 54.666,21.916 54.564,22.019 ; v1(48.975,23.05) 49.275,22.75 51.357,22.75 52.083,22.024 54.564,22.024
  Bottom Layer w0.34: RA3_R1.4@48.011,22.796 48.265,23.05 v1(48.975,23.05)
DRAM_CK0: R2_R0.2 RA9_R0.5 U1.W1 | length 59.3
  Top Layer w0.1: U1.W1@45.938,43.394 v1(46.386,42.946)
  MidLayer2 w0.15: v1@39.986,51.05 39.986,46.721 40.257,46.45 47.975,46.45 47.975,47.375 48.7,47.375 48.7,46.925 51.9,46.925 51.9,46.175 50.425,46.175 50.425,44 ; v1(46.386,42.946) 46.74,43.3 47.375,43.3 47.75,42.925 48.425,42.925 49.5,44 50.425,44 ; v4(67.616,45.417) 67.274,45.075 62.175,45.075 61.8,44.7 61.358,44.7 61.158,44.9 60.539,44.9 60.339,44.7 58.325,44.7 57.15,43.525 57.15,38.825 55.2,36.875 53.975,36.875 52.6,38.25 52.6,42.3 50.9,44 50.425,44
  Bottom Layer w0.1: 67.234,45.228 67.428,45.228 v4(67.616,45.417)
  Bottom Layer w0.34: R2_R0.2@38.961,51.471 39.629,51.471 39.986,51.114 v1@39.986,51.05 ; v4(67.616,45.417) 68.684,45.417 RA9_R0.5@68.709,45.391
  other v1: 40.05,51.05
DRAM_CK0_FB: R2_R0.1 U1.AE14 | length 8
  Top Layer w0.1: U1.AE14@32.927,49.449 32.951,49.449 v1(33.45,48.95)
  Bottom Layer w0.34: v1(33.45,48.95) 32.925,49.475 32.925,51.1 33.175,51.35 35.8,51.35 35.975,51.525 R2_R0.1@37.65,51.525
DRAM_CK1: R2_R1.2 RA9_R1.5 U1.F5 | length 51
  Top Layer w0.1: U1.F5@41.927,30.449 41.976,30.449 v1(42.5,29.925)
  MidLayer2 w0.15: v1(42.025,24.6) 40.75,25.875 40.75,26.25 40.9,26.4 42.875,26.4 43.025,26.55 43.025,27.275 42.875,27.425 41.175,27.425 40.95,27.65 40.95,31.325 41.15,31.525 42.325,31.525 42.5,31.35 v1(42.5,29.925) 44.05,29.925 44.878,29.097 44.878,26.828 44.65,26.6 44.65,25.075 47.7,22.025 48.54,22.025 48.94,22.425 49.273,22.425 49.673,22.025 52.725,22.025 55.125,24.425 58.1,24.425 58.475,24.8 58.855,24.8 59.03,24.625 64.407,24.625 67.332,21.7 67.821,21.7 v1(67.992,21.871)
  Bottom Layer w0.34: v1(67.992,21.871) RA9_R1.5@69.061,21.871
  Bottom Layer w0.4: v1(42.025,24.6) R2_R1.2@42.575,24.6
DRAM_CK1_FB: R2_R1.1 U1.C14 | length 21.5
  Top Layer w0.1: U1.C14@32.927,27.449 33.001,27.449 v1(33.5,26.95)
  MidLayer2 w0.15: v1(33.5,26.95) 33.95,27.45 33.95,31.225 34.175,31.45 39.725,31.45 40,31.175 40,24.3 40.25,24.05 41.475,24.05 v1(42.025,23.5)
  Bottom Layer w0.4: v1(42.025,23.5) R2_R1.1@42.75,23.5 R2_R1.1@42.775,23.5
DRAM_CKE0: RA6_R0.8 U1.W5 | length 36.2
  Top Layer w0.1: U1.W5@41.927,43.449 U1.W5@41.951,43.449 ; U1.W5@41.962,43.395 v1(42.411,42.946)
  DDR layer 1 w0.1: v1(42.411,42.946) 41.861,43.496 41.861,44.296 42.689,45.124 44.789,45.124 45.586,45.921 46.586,45.921 47.242,46.577 47.592,46.577 47.723,46.709 47.986,46.971 49.936,46.971 50.436,47.471 52.786,47.471 53.911,48.596 58.786,48.596 61.057,46.325 62.35,46.325 62.35,45.6 62.85,45.6 62.85,46.325 63.4,46.325 63.4,45.6 63.875,45.6 63.875,46.325 64.375,46.325 64.375,45.6 64.8,45.6 64.8,46.325 65.663,46.325 65.959,46.621 v1(67.536,46.621)
  Bottom Layer w0.34: v1(67.536,46.621) 68.605,46.621 RA6_R0.8@68.634,46.591
DRAM_CKE1: RA6_R1.8 U1.N4 | length 35.7
  Top Layer w0.1: U1.N4@42.927,37.423 U1.N4@42.927,37.449 43.326,37.05 v1(43.425,37.05)
  DDR layer 2 w0.1: 62.475,26.375 63.725,25.125 63.725,23 64.425,23 64.425,24.175 65.125,24.175 65.125,23 65.13,22.995 v1(67.792,22.995)
  DDR layer 2 w0.101: v1(43.425,37.05) 44.075,36.4 45.475,36.4 45.725,36.15 45.725,35.875 46.199,35.401 47.539,35.401 49.764,33.175 52.15,33.175 53.65,31.675 57.175,31.675 62.475,26.375
  Bottom Layer w0.34: v1(67.792,22.995) 68.835,22.995 RA6_R1.8@68.886,23.046
DRAM_D0_0: RA10_R0.2 U1.P3 | length 36.3
  Top Layer w0.101: U1.P3@43.927,38.448 43.927,38.405 v1(44.436,37.896)
  DDR layer 1 w0.101: v1(44.436,37.896) 44.579,37.896 45,37.475 45.625,37.475 45.95,37.15 45.95,36.675 46.172,36.453 46.802,36.453 49.5,33.755 49.5,31.65 50.247,30.903 56.103,30.903 56.505,30.5 58.825,30.5 59.6,31.275 59.6,31.525 59.204,31.921 55.036,31.921 54.361,32.596 53.6,32.596 53.6,31.95 53.075,31.95 53.075,32.6 52.525,32.6 52.525,31.95 52.025,31.95 52.025,32.6 51.575,32.6 51.575,31.95 51.075,31.95 51.075,32.75 v1(50.325,32.75)
  Bottom Layer w0.34: RA10_R0.2@49.111,33.246 49.641,33.246 50.163,32.724 v1@50.325,32.724
DRAM_D0_1: RA10_R0.3 U1.P8 | length 35.4
  Top Layer w0.101: U1.P8@38.927,38.449 38.927,38.398 v1(39.425,37.9)
  DDR layer 1 w0.101: v1(39.425,37.9) 39.852,38.327 47.735,38.327 49.005,37.057 49.005,35.295 49.45,34.85 51.825,34.85 51.825,35.475 52.3,35.475 52.3,34.85 52.8,34.85 52.8,35.475 53.725,35.475 ; v1@50.205,34.349 50.215,34.36 50.28,34.425 54.525,34.425 54.754,34.196 58.121,34.196 58.45,34.525 58.45,35.532 58.182,35.8 57.057,35.8 56.886,35.971 54.236,35.971 53.732,35.468
  Bottom Layer w0.34: RA10_R0.3@49.111,34.046 49.211,34.146 50.001,34.146 v1@50.205,34.349
  other v1: 50.15,34.425
DRAM_D0_2: RA10_R0.4 U1.T2 | length 36.5
  Top Layer w0.1: U1.T2@44.927,40.449 U1.T2@45.001,40.449 ; U1.T2@45.012,40.395 45.361,40.046 v1(45.436,40.046)
  DDR layer 1 w0.101: v1(45.436,40.046) 45.858,39.624 46.633,39.624 47.066,39.191 48.266,39.191 49.982,37.475 53.325,37.475 53.85,38 58.482,38 58.711,37.771 61.704,37.771 61.925,37.55 61.925,36.45 61.325,35.85 60.25,35.85 60.25,36.75 59.2,36.75 59.2,35.85 58.6,35.85 58.6,36.75 56.9,36.75 56.45,36.3 54.172,36.3 53.743,35.871 51.771,35.871 51,35.1 49.85,35.1 v1(49.425,35.525)
  Bottom Layer w0.34: RA10_R0.4@49.411,34.871 v1@49.411,35.404
DRAM_D0_3: RA11_R0.1 U1.R3 | length 35.3
  Top Layer w0.1: U1.R3@43.927,39.449 43.976,39.449 v1(44.425,39)
  DDR layer 1 w0.101: v1(44.425,39) 44.85,38.575 48.187,38.575 48.439,38.324 50.191,36.571 50.521,36.571 50.842,36.892 55.792,36.892 56.421,37.521 61.362,37.521 61.515,37.368 61.515,37.115 61.392,36.992 ; v1(50.1,36.15) 51.025,36.15 51.025,36.625 51.4,36.625 51.4,36.15 51.782,36.15 51.786,36.154 51.786,36.625 52.311,36.625 52.311,36.103 52.761,36.103 52.761,36.625 53.261,36.625 53.261,36.2 53.736,36.2 53.736,36.55 56.05,36.55 56.5,37 61.392,37
  Bottom Layer w0.34: RA11_R0.1@49.136,36.146 v1(50.1,36.15)
DRAM_D0_4: RA11_R0.2 U1.P2 | length 35.2
  Top Layer w0.1: U1.P2@44.938,38.394 v1(45.436,37.896)
  DDR layer 1 w0.101: v1@45.495,37.955 46.172,37.278 46.653,37.278 46.803,37.428 47.797,37.428 48.043,37.182 48.043,35.864 49.907,34 54.607,34 54.683,33.924 57.426,33.924 58,33.35 58,33.125 57.8,32.925 56.3,32.925 56.3,33.55 55.825,33.55 55.825,32.925 55.325,32.925 55.325,33.55 54.85,33.55 54.85,32.925 53,32.925 53,33.55 52.525,33.55 52.525,32.925 52.025,32.925 52.025,33.55 51.55,33.55 51.55,33.175 50.025,33.175 49.775,33.425 49.775,33.812 47.525,36.062 v1(47.525,36.45)
  Bottom Layer w0.34: v1(47.525,36.45) 48.087,36.45 48.583,36.946 RA11_R0.2@49.136,36.946
DRAM_D0_5: RA11_R0.3 U1.T1 | length 36.6
  Top Layer w0.1: U1.T1@45.8,40.475 U1.T1@45.927,40.475 ; U1.T1@45.938,40.395 46.287,40.046 v1(46.386,40.046)
  DDR layer 1 w0.1: 53.096,37.725 53.621,38.25 58.336,38.25 ; 56.615,38.55 57.286,39.221 61.836,39.221
  DDR layer 1 w0.101: v1(46.386,40.046) 46.676,40.046 47.298,39.424 48.488,39.424 49.362,38.55 52.815,38.55 56.615,38.55 ; v1(50.23,37.897) 51.125,37.897 51.125,38.25 51.525,38.25 51.525,37.725 51.85,37.725 51.85,38.25 52.225,38.25 52.225,37.725 53.096,37.725 ; 58.336,38.25 58.336,38.92 ; 58.337,38.921 59.436,38.921 59.436,38.046 59.861,38.046 59.861,38.921 60.286,38.921 60.286,38.046 60.711,38.046 60.711,38.596 61.861,38.596 61.95,38.685 61.95,39.107 61.836,39.221
  Bottom Layer w0.34: RA11_R0.3@49.136,37.746 49.287,37.897 v1(50.23,37.897)
DRAM_D0_6: RA11_R0.4 U1.U2 | length 36.1
  Top Layer w0.1: U1.U2@44.927,41.423 U1.U2@44.927,41.449 ; U1.U2@44.938,41.369 v1(45.436,40.871)
  DDR layer 1 w0.101: v1(45.436,40.871) 45.858,40.449 46.613,40.449 47.388,39.674 ; 47.392,39.67 48.564,39.67 49.457,38.778 56.493,38.778 57.164,39.449 59.275,39.449 59.275,39.875 59.65,39.875 59.65,39.449 60.05,39.449 60.05,39.875 60.425,39.875 60.425,39.449 61.839,39.449 62.161,39.771 62.161,40.296 61.707,40.75 59.315,40.75 58.311,39.746 56.986,39.746 56.442,39.202 53.055,39.202 52.527,39.73 49.98,39.73 49.8,39.55 v1(49.8,39.175)
  Bottom Layer w0.34: RA11_R0.4@49.136,38.546 49.186,38.596 49.236,38.546 49.686,38.546 49.8,38.66 v1(49.8,39.175)
DRAM_D0_7: RA4_R0.1 U1.U1 | length 35.9
  Top Layer w0.1: U1.U1@45.938,41.395 46.386,40.947 v1(46.386,40.871)
  DDR layer 1 w0.1: v1(46.386,40.871) 46.516,40.871 47.412,39.975 53.816,39.975 53.887,40.046 ; 48.761,40.346 49.215,40.8 50.05,40.8 50.25,40.6 ; 51.575,40.6 51.902,40.6
  DDR layer 1 w0.101: v1@47.586,40.296 v1@47.611,40.296 ; v1(47.611,40.346) 48.761,40.346 ; 50.25,40.6 50.25,40.25 50.675,40.25 50.675,41.05 51.175,41.05 51.175,40.25 51.575,40.25 51.575,40.6 ; 51.902,40.6 56.729,40.6 57.025,40.896 57.671,40.896 58.675,41.9 61.4,41.9 61.525,41.775 61.525,41.1 61.425,41 58.225,41 57.271,40.046 56.811,40.046 56.411,39.646 55.236,39.646 54.782,40.1 53.941,40.1 53.887,40.046
  Bottom Layer w0.34: v1@47.586,40.296 47.611,40.296 48.461,40.296 RA4_R0.1@48.611,40.146
DRAM_D0_8: RA8_R0.5 U1.U5 | length 35.2
  Top Layer w0.101: U1.U5@41.927,41.449 41.927,41.398 v1(42.4,40.925)
  DDR layer 2 w0.101: v1@42.411,40.871 42.433,40.896 42.911,41.446 43.811,41.446 43.936,41.571 48.536,41.571 49.329,40.778 51.529,40.778 53.708,38.599 56.5,38.599 56.5,37.925 57,37.925 57,38.571 57.475,38.571 57.475,37.925 57.975,37.925 57.975,38.599 58.475,38.599 58.475,37.728 59.45,37.728 59.45,38.599 60.025,38.599 60.025,37.925 60.575,37.925 60.575,38.599 61.833,38.599 62.436,37.996 63.246,37.996 63.825,38.575 66.19,38.575 67.161,39.546 v1(67.617,39.546)
  Bottom Layer w0.34: v1(67.617,39.546) 68.686,39.546 RA8_R0.5@68.711,39.521
DRAM_D0_9: RA8_R0.6 U1.U3 | length 35.3
  Top Layer w0.1: U1.U3@43.927,41.423 U1.U3@43.927,41.449 ; U1.U3@43.938,41.369 44.361,40.946 v1(44.411,40.946)
  DDR layer 2 w0.101: v1(44.411,40.946) 44.786,41.321 47.834,41.321 49.203,39.953 52.035,39.953 53.687,38.3 55.425,38.3 56.275,37.45 60.425,37.45 60.721,37.746 63.811,37.746 63.811,37.025 64.261,37.025 64.261,38.275 64.686,38.275 64.686,37.025 65.086,37.025 65.086,38.25 65.511,38.25 65.511,37.75 66.29,37.75 66.94,38.4 67.875,38.4 68.25,38.775 v1(70.225,38.775)
  Bottom Layer w0.34: RA8_R0.6@68.7,38.775 68.711,38.775 v1(70.225,38.775)
DRAM_D0_10: RA8_R0.7 U1.T5 | length 35.2
  Top Layer w0.1: U1.T5@41.927,40.449 41.951,40.449 v1(42.35,40.05)
  DDR layer 2 w0.1: 62.15,36.65 62.15,37.425
  DDR layer 2 w0.101: v1(42.35,40.05) 42.765,40.465 46.922,40.465 47.684,39.703 51.904,39.703 53.582,38.025 55.35,38.025 56.25,37.125 59.159,37.125 59.159,36.166 59.479,35.846 60.236,35.846 60.236,37.15 61.163,37.15 61.163,35.921 61.661,35.921 61.661,37.425 62.15,37.425 ; 62.15,36.646 66.871,36.646 67.617,37.392 v1@67.617,37.896
  Bottom Layer w0.34: v1@67.617,37.896 67.625,37.896 68.686,37.896 RA8_R0.7@68.711,37.921
  other v1: 67.625,37.925
DRAM_D0_11: RA8_R0.8 U1.T4 | length 35.7
  Top Layer w0.101: U1.T4@42.927,40.449 U1.T4@43.026,40.449 ; U1.T4@43.037,40.395 v1(43.425,40.05)
  DDR layer 2 w0.101: v1(43.425,40.05) 43.798,39.634 47.423,39.634 47.632,39.425 48.825,39.425 49.525,38.725 52.259,38.725 54.106,36.878 58.072,36.878 59.354,35.596 61.661,35.596 62.386,36.321 67.496,36.321 68.111,36.936 68.111,38.05 68.525,38.05 68.525,36.925 68.975,36.925 68.975,38.05 69.4,38.05 69.4,37.525 69.8,37.525 v1(70.225,37.95)
  Bottom Layer w0.34: RA8_R0.8@68.711,37.121 69.461,37.121 ; 69.45,37.175 v1(70.225,37.95)
DRAM_D0_12: RA7_R0.5 U1.R5 | length 35.5
  Top Layer w0.1: U1.R5@41.927,39.449 41.951,39.449 v1(42.4,39)
  DDR layer 2 w0.101: v1(42.4,39) 42.803,39.403 47.334,39.403 47.559,39.178 48.702,39.178 49.405,38.475 52.187,38.475 54.012,36.65 57.9,36.65 59.204,35.346 61.861,35.346 62.586,36.071 68.2,36.071 ; 68.2,36.075 68.2,36.071 ; v1(70.225,35.625) 69.475,35.625 69.475,35.15 69.025,35.15 69.025,36.075 68.575,36.075 68.575,35.15 68.2,35.15 68.2,36.071
  Bottom Layer w0.34: RA7_R0.5@68.7,35.925 68.711,35.925 69.925,35.925 v1(70.225,35.625)
DRAM_D0_13: RA7_R0.6 U1.R6 | length 36.2
  Top Layer w0.1: U1.R6@40.927,39.449 40.976,39.449 v1(41.425,39)
  DDR layer 2 w0.1: 62.716,35.796 63.746,35.796 63.75,35.8 63.75,35.075 64.3,35.075 64.3,35.8 64.85,35.8 64.85,35.075 65.45,35.075 65.45,35.8 66.125,35.8 66.125,35.075 67.613,35.075 v1(67.617,35.071)
  DDR layer 2 w0.101: v1(41.425,39) 41.894,38.531 48.219,38.531 49.075,37.675 49.325,37.675 49.325,38.2 49.786,38.2 49.786,37.475 50.738,37.475 50.738,38.2 51.386,38.2 51.386,37.421 52.916,37.421 54.087,36.25 56.837,36.25 57.287,35.8 58.162,35.8 58.866,35.096 62.016,35.096 62.716,35.796
  Bottom Layer w0.34: v1(67.617,35.071) RA7_R0.6@68.711,35.071
DRAM_D0_14: RA7_R0.7 U1.P4 | length 35.3
  Top Layer w0.1: U1.P4@42.927,38.449 42.927,38.423 v1(43.4,37.9)
  DDR layer 2 w0.101: v1(43.4,37.9) 43.799,38.299 48.001,38.299 49.729,36.571 51.661,36.571 51.661,35.4 52.286,35.4 52.286,36.575 53.038,36.575 53.038,35.4 53.636,35.4 53.636,35.925 55.736,35.925 55.736,34.125 56.611,34.125 56.611,35.646 57.075,35.646 57.075,34.849 67.014,34.849 v1(67.617,34.246)
  Bottom Layer w0.101: v1(67.617,34.246) RA7_R0.7@68.686,34.246
DRAM_D0_15: RA7_R0.8 U1.P5 | length 35.9
  Top Layer w0.1: U1.P5@41.927,38.423 U1.P5@41.927,38.449
  Top Layer w0.101: U1.P5@41.927,38.449 41.927,38.373 v1(42.4,37.9)
  DDR layer 2 w0.101: v1(42.4,37.9) 42.847,37.453 45.972,37.453 46.147,37.278 46.666,37.278 46.816,37.428 47.922,37.428 48.05,37.3 48.05,35.875 48.825,35.1 53.757,35.1 55.011,33.846 57.186,33.846 57.786,33.246 62.554,33.246 62.9,32.9 64.411,32.9 64.411,34.2 64.961,34.2 64.961,32.9 65.486,32.9 65.486,34.2 66.025,34.2 66.025,32.9 66.55,32.9 66.55,33.425 66.555,33.42 v1(67.617,33.42)
  Bottom Layer w0.101: v1(67.617,33.42) 68.66,33.42 RA7_R0.8@68.711,33.471
DRAM_D1_0: RA10_R1.2 U1.L6 | length 35
  Top Layer w0.101: U1.L6@40.927,35.448 v1(41.425,34.95)
  DDR layer 1 w0.101: v1(41.425,34.95) 40.95,34.475 39.4,34.475 38.827,33.902 38.827,25.448 40.225,24.05 40.65,24.05 41.025,23.675 41.025,21.65 44.15,18.525 44.15,17.775 44.672,17.253 46.772,17.253 47.882,16.143 47.882,11.3 48.861,10.321 v1(49.83,10.321)
  Bottom Layer w0.34: RA10_R1.2@48.736,10.321 v1(49.83,10.321)
DRAM_D1_1: RA10_R1.3 U1.K7 | length 36.6
  Top Layer w0.1: U1.K7@39.927,34.449 39.976,34.449 v1(40.525,33.9)
  DDR layer 1 w0.1: 41.374,22.201 41.374,21.626 44.4,18.6 44.4,17.88 ; 50.736,10.724 51.724,10.724 51.825,10.825 51.825,10.975 51.679,11.121 50.883,11.121
  DDR layer 1 w0.101: v1(40.525,33.9) 40.075,33.45 39.3,33.45 39.075,33.225 39.075,26.8 41.374,24.501 41.374,22.201 ; 44.4,17.88 44.79,17.49 46.86,17.49 48.108,16.242 48.108,11.599 48.983,10.724 50.736,10.724 ; v1(49.83,11.121) 50.883,11.121
  Bottom Layer w0.34: RA10_R1.3@48.736,11.121 v1(49.83,11.121)
DRAM_D1_2: RA10_R1.4 U1.J7 | length 35.5
  Top Layer w0.101: U1.J7@39.927,33.449 40.026,33.449 v1(40.525,32.95)
  DDR layer 1 w0.101: v1(40.525,32.95) 40.1,32.525 40.1,26.8 41.6,25.3 41.6,21.755 44.93,18.425 47.282,18.425 48.334,17.373 48.334,11.973 48.783,11.524 52.549,11.524 52.65,11.625 52.65,11.825 52.529,11.946 v1(49.83,11.946)
  Bottom Layer w0.34: RA10_R1.4@48.736,11.921 48.761,11.946 v1(49.83,11.946)
DRAM_D1_3: RA11_R1.1 U1.K6 | length 35.8
  Top Layer w0.101: U1.K6@40.927,34.449 40.976,34.449 v1(41.425,34)
  DDR layer 1 w0.101: v1(41.425,34) 40.927,33.502 40.927,26.448 42.45,24.925 42.45,21.4 45.15,18.7 47.33,18.7 48.56,17.47 48.56,12.922 49.036,12.446 52.821,12.446 52.925,12.55 52.925,13.05 52.826,13.149 49.78,13.149 v1@49.778,13.147
  Bottom Layer w0.34: RA11_R1.1@48.686,13.171 48.711,13.146 v1(49.78,13.146)
DRAM_D1_4: RA11_R1.2 U1.J6 | length 35.3
  Top Layer w0.1: U1.J6@40.927,33.398 v1(41.375,32.95)
  DDR layer 1 w0.101: v1(41.375,32.95) 41.777,32.548 41.777,26.973 42.702,26.048 42.702,24.498 43.175,24.025 43.675,24.025 44.086,23.614 44.086,21.071 46.229,18.928 47.472,18.928 48.786,17.614 48.786,14.046 49.283,13.549 52.85,13.549 52.85,13.55 52.975,13.675 52.975,14.275 52.825,14.425 52.25,14.425 52.25,13.975 51.8,13.975 51.8,14.425 51.35,14.425 51.35,13.975 50.925,13.975 50.925,14.425 50.475,14.425 50.475,13.975 50.471,13.971 v1(49.78,13.971)
  Bottom Layer w0.34: RA11_R1.2@48.686,13.971 v1(49.78,13.971)
DRAM_D1_5: RA11_R1.3 U1.J5 | length 35.6
  Top Layer w0.1: U1.J5@41.927,33.449 v1(42.425,32.95)
  DDR layer 1 w0.101: v1(42.425,32.95) 42.025,32.55 42.025,31.45 42.95,30.525 42.95,26.875 42.95,25.875 44.313,24.512 44.313,21.194 46.332,19.175 48.657,19.175 48.986,18.846 52.229,18.846 53.675,17.4 53.675,15.475 53,14.8 52.175,14.8 52.175,15.775 51.65,15.775 51.65,14.8 51.1,14.8 51.1,15.775 50.6,15.775 50.6,14.8 49.783,14.8 v1(49.78,14.796)
  Bottom Layer w0.34: RA11_R1.3@48.686,14.771 48.711,14.796 v1(49.78,14.796)
DRAM_D1_6: RA11_R1.4 U1.M7 | length 35.3
  Top Layer w0.1: U1.M7@39.927,36.449 39.951,36.449 v1(40.375,36.025) v1@40.4,36
  DDR layer 2 w0.101: v1@40.4,36 40,35.6 39.1,35.6 38.825,35.325 38.825,20.95 39.75,20.025 39.75,17.825 40.1,17.475 40.975,17.475 42.325,16.125 45.411,16.125 45.411,15.275 45.886,15.275 45.886,16.346 47.111,16.346 47.111,15.3 48.34,15.3 48.662,15.622 v1(49.78,15.622) ; v1@49.779,15.623 v1(49.78,15.622)
  Bottom Layer w0.34: RA11_R1.4@48.686,15.571 48.737,15.622 v1(49.78,15.622)
DRAM_D1_7: RA4_R1.1 U1.M6 | length 35.3
  Top Layer w0.101: U1.M6@40.927,36.449 41.001,36.449 v1(41.425,36.025)
  DDR layer 2 w0.101: v1(41.425,36.025) 40.819,35.369 39.269,35.369 39.052,35.152 39.052,22.048 40,21.1 40.27,21.1 40.75,20.62 40.75,18.325 41.8,17.275 46.925,17.275 46.925,16.75 47.4,16.75 47.4,17.571 47.875,17.571 47.875,16.745 48.35,16.745 48.35,17.55 48.8,17.55 48.8,16.745 v1(49.655,16.745)
  Bottom Layer w0.34: RA4_R1.1@48.561,16.796 48.612,16.745 v1(49.655,16.745)
DRAM_D1_8: RA8_R1.5 U1.J3 | length 35
  Top Layer w0.101: U1.J3@43.944,33.449 U1.J3@43.927,33.449 43.876,33.449 43.902,33.423 v1(44.375,32.95) ; v1@44.363,32.94 v1@44.375,32.925
  DDR layer 1 w0.101: v1(44.375,32.95) 44.925,32.4 44.925,31.775 45.275,31.425 45.5,31.425 45.775,31.15 46.975,31.15 47.665,30.46 47.665,27.379 48.261,26.783 48.261,25.351 48.738,24.874 49.988,24.874 51.663,23.199 54.701,23.199 61.579,16.321 v1(67.617,16.321)
  Bottom Layer w0.34: v1(67.617,16.321) 68.686,16.321 RA8_R1.5@68.711,16.296
DRAM_D1_9: RA8_R1.6 U1.G1 | length 35.1
  Top Layer w0.101: U1.G1@45.927,31.449 v1@46.705,30.67
  DDR layer 1 w0.101: v1(46.726,30.691) 47.425,29.991 47.425,27.28 48.03,26.675 48.03,25.252 48.646,24.636 49.901,24.636 52.263,22.274 55.226,22.274 61.5,16 63.15,16 63.654,15.496 64.275,15.496 64.275,16.05 64.75,16.05 64.75,15.496 65.236,15.496 65.236,16.05 65.736,16.05 65.736,15.5 66.236,15.5 66.236,16.05 66.686,16.05 66.686,15.496 67.086,15.496 v1(67.617,15.496)
  Bottom Layer w0.34: v1(67.617,15.496) RA8_R1.6@68.711,15.496
DRAM_D1_10: RA8_R1.7 U1.G2 | length 36.1
  Top Layer w0.101: U1.G2@44.927,31.449 45.414,30.961 v1(45.414,30.937)
  DDR layer 1 w0.1: v1(45.414,30.937) 45.876,30.475 46.225,30.475 47.15,29.55 47.15,27.2
  DDR layer 1 w0.101: 47.15,27.2 47.788,26.562 47.788,25.174 48.563,24.399 49.813,24.399 52.188,22.024 55.026,22.024 62.372,14.678 64.275,14.678 64.275,15.196 64.75,15.196 64.75,14.671 65.225,14.671 65.225,15.2 65.725,15.2 65.725,14.671 66.25,14.671 66.25,15.2 66.675,15.2 66.675,14.671 v1(67.617,14.671)
  Bottom Layer w0.34: v1(67.617,14.671) 68.686,14.671 RA8_R1.7@68.711,14.696
DRAM_D1_11: RA8_R1.8 U1.H3 | length 35.8
  Top Layer w0.1: U1.H3@43.927,32.448 v1(44.475,31.9)
  DDR layer 1 w0.1: 46.125,24.7 48.185,22.64
  DDR layer 1 w0.101: v1(44.475,31.9) 44.877,31.498 44.877,30.273 46.125,29.025 46.125,24.7 ; 48.185,22.64 50.397,22.64 51.244,21.793 54.937,21.793 62.885,13.845 v1(67.617,13.845)
  Bottom Layer w0.34: v1(67.617,13.845) 68.66,13.845 RA8_R1.8@68.711,13.896
DRAM_D1_12: RA7_R1.5 U1.H4 | length 37
  Top Layer w0.1: U1.H4@42.927,32.449 43.375,32.001 v1(43.375,31.925)
  DDR layer 1 w0.101: v1@43.463,31.912 43.468,31.912 43.925,31.455 43.925,30.25 44.85,29.325 44.85,28.85 45.25,28.45 45.55,28.45 45.875,28.125 45.875,24.575 48.071,22.379 49.603,22.379 50.458,21.524 53.726,21.524 62.325,12.925 v1(67.6,12.925)
  Bottom Layer w0.34: v1(67.6,12.925) 67.829,12.696 RA7_R1.5@68.686,12.696 RA7_R1.5@68.661,12.721
DRAM_D1_13: RA7_R1.6 U1.D2 | length 36.1
  Top Layer w0.101: U1.D2@44.927,28.427 U1.D2@44.927,28.449 ; U1.D2@44.927,28.449 44.951,28.449 v1(45.45,27.95)
  DDR layer 1 w0.101: v1(45.45,27.95) 45.049,27.574 45.049,22.808 45.357,22.5 46.5,22.5 47.454,21.546 50.116,21.546 50.388,21.274 53.579,21.274 62.832,12.02 64.275,12.02 64.275,12.5 64.75,12.5 64.75,12.02 65.225,12.02 65.225,12.5 65.725,12.5 65.725,12.02 v1(67.425,12.02)
  Bottom Layer w0.34: v1(67.425,12.02) 68.562,12.02 RA7_R1.6@68.686,11.896
DRAM_D1_14: RA7_R1.7 U1.E3 | length 36.4
  Top Layer w0.101: U1.E3@43.927,29.449 43.927,29.398 v1(44.375,28.925)
  DDR layer 1 w0.101: v1(44.375,28.925) 44.777,28.523 ; 44.788,28.523 44.788,22.012 46.088,20.712 50.295,20.712 50.558,20.449 53.251,20.449 57.375,16.325 57.375,16.025 61.925,11.475 v1(67.725,11.475)
  Bottom Layer w0.34: v1(67.725,11.475) 68.079,11.096 RA7_R1.7@68.686,11.096
DRAM_D1_15: RA7_R1.8 U1.E4 | length 37.3
  Top Layer w0.1: U1.E4@42.927,29.449 42.927,29.373 v1(43.375,28.925)
  DDR layer 1 w0.1: v1@43.414,28.888 v1(43.375,28.925) 43.869,28.431 43.869,25.288 44.548,24.608
  DDR layer 1 w0.101: 44.548,24.608 44.548,21.932 46.355,20.125 47.587,20.125 47.941,19.771 51.854,19.771 60.625,11 v1(67.4,11)
  Bottom Layer w0.34: v1(67.4,11) 67.4,10.8 67.904,10.296 RA7_R1.8@68.686,10.296